# EAGLE board CT_schematic (EAGLE 7.6.0)

Size 100 x 80 mm. Coordinates in mm from the lower left corner, seen from the top.
Outline: 0,0 100,0 100,80 0,80 0,0
Copper layers (1*16): Top 0.035mm / dielectric 1.5mm / Bottom 0.035mm
Design rules "default": minimum track width 10mil, minimum drill 24mil, track to track 8mil, track to pad 8mil, pad to pad 8mil, via to via 8mil, smd to smd 8mil, copper to edge 40mil, drill to drill 8mil, minimum pad ring 10mil, minimum via ring 8mil, stop-mask expansion 4mil, vias tented up to drill 0mil, thermal gap 10mil

## Footprints (pad centres in the part's own frame; a part is rotated, then mirrored left to right if it is on the bottom)
C0603 = smd 0.8 x 0.8: 1 -0.762,0; 2 0.762,0
C0402 = smd 0.5 x 0.5: 1 -0.508,0; 2 0.508,0
C1210 = smd 1.2 x 2.5: 1 -1.524,0; 2 1.524,0
R0603 = smd 0.8 x 0.8: 1 -0.762,0; 2 0.762,0
EXV-9H = smd 3.505 x 1.676: 1 -2.857,0; 2 2.857,0
L0603 = smd 0.8 x 0.8: 1 -0.762,0; 2 0.762,0
IND25X25CZ = smd 2.489 x 3.429: 1 -2.718,0; 2 2.718,0
PJ-037B_PACKAGE = drill 3.7 square: 1 12,0 | drill 3.2 square: 2 6,0
LQFP100 = smd 0.3 x 1.2: 1 -6,-7.75; 2 -5.5,-7.75; 3 -5,-7.75; 4 -4.5,-7.75; 5 -4,-7.75; 6 -3.5,-7.75; 7 -3,-7.75; 8 -2.5,-7.75; 9 -2,-7.75; 10 -1.5,-7.75; 11 -1,-7.75; 12 -0.5,-7.75; 13 0,-7.75; 14 0.5,-7.75; 15 1,-7.75; 16 1.5,-7.75; 17 2,-7.75; 18 2.5,-7.75; 19 3,-7.75; 20 3.5,-7.75; 21 4,-7.75; 22 4.5,-7.75; 23 5,-7.75; 24 5.5,-7.75; 25 6,-7.75; 51 6,7.75; 52 5.5,7.75; 53 5,7.75; 54 4.5,7.75; 55 4,7.75; 56 3.5,7.75; 57 3,7.75; 58 2.5,7.75; 59 2,7.75; 60 1.5,7.75; 61 1,7.75; 62 0.5,7.75; 63 0,7.75; 64 -0.5,7.75; 65 -1,7.75; 66 -1.5,7.75; 67 -2,7.75; 68 -2.5,7.75; 69 -3,7.75; 70 -3.5,7.75; 71 -4,7.75; 72 -4.5,7.75; 73 -5,7.75; 74 -5.5,7.75; 75 -6,7.75 | smd 1.2 x 0.3: 26 7.75,-6; 27 7.75,-5.5; 28 7.75,-5; 29 7.75,-4.5; 30 7.75,-4; 31 7.75,-3.5; 32 7.75,-3; 33 7.75,-2.5; 34 7.75,-2; 35 7.75,-1.5; 36 7.75,-1; 37 7.75,-0.5; 38 7.75,0; 39 7.75,0.5; 40 7.75,1; 41 7.75,1.5; 42 7.75,2; 43 7.75,2.5; 44 7.75,3; 45 7.75,3.5; 46 7.75,4; 47 7.75,4.5; 48 7.75,5; 49 7.75,5.5; 50 7.75,6; 76 -7.75,6; 77 -7.75,5.5; 78 -7.75,5; 79 -7.75,4.5; 80 -7.75,4; 81 -7.75,3.5; 82 -7.75,3; 83 -7.75,2.5; 84 -7.75,2; 85 -7.75,1.5; 86 -7.75,1; 87 -7.75,0.5; 88 -7.75,0; 89 -7.75,-0.5; 90 -7.75,-1; 91 -7.75,-1.5; 92 -7.75,-2; 93 -7.75,-2.5; 94 -7.75,-3; 95 -7.75,-3.5; 96 -7.75,-4; 97 -7.75,-4.5; 98 -7.75,-5; 99 -7.75,-5.5; 100 -7.75,-6
SAMTEC_FTSH-105-01-L-DV-K = smd 0.762 x 2.794: 1 -2.54,-2.032; 2 -2.54,2.032; 3 -1.27,-2.032; 4 -1.27,2.032; 5 0,-2.032; 6 0,2.032; 7 1.27,-2.032; 8 1.27,2.032; 9 2.54,-2.032; 10 2.54,2.032
TDFN-8/6MM = smd 0.3 x 0.75: 1 0,0; 2 0.5,0; 3 1,0; 4 1.5,0; 5 1.5,3; 6 1,3; 7 0.5,3; 8 0,3
SOIC-8 = smd 1.6 x 0.6: 1 -2.7,1.905 | smd 1.55 x 0.6: 2 -2.7,0.635; 3 -2.7,-0.635; 4 -2.7,-1.905; 5 2.7,-1.905; 6 2.7,-0.635; 7 2.7,0.635; 8 2.7,1.905
182-009-MALE = drill 1.194 pad 1.524 octagon: 1 -5.537,10.923; 2 -2.769,10.923; 3 0,10.923; 4 2.769,10.923; 5 5.537,10.923; 6 -4.153,8.08; 7 -1.384,8.08; 8 1.384,8.08; 9 4.153,8.08 | hole 3.048: -12.446,9.501; 12.446,9.501
S25FL128SDSMFI000 = smd 0.5 x 1.6: 1 0,0; 2 1.27,0; 3 2.54,0; 4 3.81,0; 5 5.08,0; 6 6.35,0; 7 7.62,0; 8 8.89,0; 9 8.89,8.9; 10 7.62,8.9; 11 6.35,8.9; 12 5.08,8.9; 13 3.81,8.9; 14 2.54,8.9; 15 1.27,8.9; 16 0,8.9
SSOP-28 = smd 1.5 x 0.4: 1 -3.625,4.225; 2 -3.625,3.575; 3 -3.625,2.925; 4 -3.625,2.275; 5 -3.625,1.625; 6 -3.625,0.975; 7 -3.625,0.325; 8 -3.625,-0.325; 9 -3.625,-0.975; 10 -3.625,-1.625; 11 -3.625,-2.275; 12 -3.625,-2.925; 13 -3.625,-3.575; 14 -3.625,-4.225; 15 3.625,-4.225; 16 3.625,-3.575; 17 3.625,-2.925; 18 3.625,-2.275; 19 3.625,-1.625; 20 3.625,-0.975; 21 3.625,-0.325; 22 3.625,0.325; 23 3.625,0.975; 24 3.625,1.625; 25 3.625,2.275; 26 3.625,2.925; 27 3.625,3.575; 28 3.625,4.225
HTSS-105-01-G-D = drill 1 pad 1.8 square: 1 0,0 | drill 1 pad 1.8: 2 0,2.54; 3 2.54,0; 4 2.54,2.54; 5 5.08,0; 6 5.08,2.54; 7 7.62,0; 8 7.62,2.54; 9 10.16,0; 10 10.16,2.54
ASEK = smd 1.4 x 1: 1 -1.1,-0.8; 2 1.1,-0.8; 3 1.1,0.8; 4 -1.1,0.8
ASFL1 = smd 1.7 x 1.5: 1 -1.27,-1.1; 2 1.27,-1.1; 3 1.27,1.1; 4 -1.27,1.1
IR3899MTR1PBF = smd 0.25 x 0.75: 1 0,0; 2 0.5,0; 3 1,0; 4 1.5,0; 5 2,0; 6 2.5,0; 7 3,0 | smd 0.75 x 0.25: 8 3.425,0.78; 9 3.425,1.28; 10 3.425,1.78; 14 -0.425,1.78; 15 -0.425,1.28; 16 -0.425,0.78 | smd 0.3 x 1.95: 11 3.22,3.63 | smd 1.62 x 2.42: 12 1.786,3.8 | smd 1 x 1.95: 13 0.117,3.63 | smd 2.19 x 1.25: 17 1.51,1.26
WSON-8 = smd 0.3 x 0.6: 1 -0.75,0; 2 0.05,0; 3 0.85,0; 4 1.65,0; 5 1.65,3.8; 6 0.85,3.8; 7 0.05,3.8; 8 -0.75,3.8 | smd 3 x 2.6: PAD 0.45,1.9
SON-6 = smd 0.55 x 0.3: 1 -0.355,0.5 | smd 0.52 x 0.3: 2 -0.37,0; 3 -0.37,-0.5; 4 0.37,-0.5; 5 0.37,0; 6 0.37,0.5
SW_4-1437565-2 = smd 1.4 x 2.1: 1 -2.23,4.55; 2 -2.23,-4.55; 3 2.23,4.55; 4 2.23,-4.55
LGM67K-G1J2-24-Z = smd 0.8 x 1.4: A -2,0; C 0,0
NC7SZ125M5X = smd 1.3 x 0.7: 1 -1.3,0.95; 2 -1.3,0; 3 -1.3,-0.95; 4 1.3,-0.95; 5 1.3,0.95

## Placement (x,y rotation side)
C1  1e-06  [C0603]  -59.69,86.36 0 top  (outside the outline)
C2  1e-07  [C0603]  -63.5,86.36 0 top  (outside the outline)
C3  1e-07  [C0603]  -67.31,86.36 0 top  (outside the outline)
C4  1e-07  [C0603]  -71.12,86.36 0 top  (outside the outline)
C5  1e-07  [C0603]  -74.93,86.36 0 top  (outside the outline)
C6  1e-07  [C0603]  -78.74,86.36 0 top  (outside the outline)
C7  1e-07  [C0603]  -82.55,86.36 0 top  (outside the outline)
C8  4.7e-06  [C0603]  -44.45,86.36 0 top  (outside the outline)
C9  2.2e-06  [C0603]  -48.26,86.36 0 top  (outside the outline)
C10  2.2e-06  [C0603]  -52.07,86.36 0 top  (outside the outline)
C11  1e-08  [C0603]  -86.36,86.36 0 top  (outside the outline)
C12  1e-06  [C0603]  -15.24,91.44 0 top  (outside the outline)
C13  1e-07  [C0603]  -19.05,91.44 0 top  (outside the outline)
C14  1e-07  [C0402]  -83.82,91.44 0 top  (outside the outline)
C15  1e-08  [C0402]  -87.63,91.44 0 top  (outside the outline)
C16  1e-06  [C0603]  -22.86,91.44 0 top  (outside the outline)
C17  1e-06  [C0603]  -26.67,91.44 0 top  (outside the outline)
C18  1e-06  [C0603]  -30.48,91.44 0 top  (outside the outline)
C19  1e-06  [C0603]  -34.29,91.44 0 top  (outside the outline)
C20  1e-07  [C0402]  -15.24,96.52 0 top  (outside the outline)
C21  1e-07  [C0402]  -19.05,96.52 0 top  (outside the outline)
C22  1e-07  [C0402]  -22.86,96.52 0 top  (outside the outline)
C23  1e-07  [C0402]  -26.67,96.52 0 top  (outside the outline)
C24  1e-07  [C0402]  -30.48,96.52 0 top  (outside the outline)
C25  1e-08  [C0402]  -34.29,96.52 0 top  (outside the outline)
C26  1e-08  [C0402]  -38.1,96.52 0 top  (outside the outline)
C27  0.0001  [C1210]  -80.01,67.31 0 top  (outside the outline)
C28  2.2e-06  [C0603]  -55.88,86.36 0 top  (outside the outline)
C29  1e-07  [C0402]  -41.91,96.52 0 top  (outside the outline)
C30  1e-07  [C0402]  -45.72,96.52 0 top  (outside the outline)
C31  8.7488758840791e-09  [R0603]  -39.37,74.93 0 top  (outside the outline)
C32  2.9825713241179e-07  [R0603]  -49.53,74.93 0 top  (outside the outline)
C35  8e-07  [R0603]  -38.1,91.44 0 top  (outside the outline)
C36  1e-05  [C1210]  -86.36,67.31 0 top  (outside the outline)
C37  1e-07  [C0402]  -49.53,96.52 0 top  (outside the outline)
C38  0.0001  [EXV-9H]  -38.1,68.58 0 top  (outside the outline)
C39  0.0001  [EXV-9H]  -49.53,68.58 0 top  (outside the outline)
C40  1e-08  [C0402]  -53.34,96.52 0 top  (outside the outline)
C41  1e-08  [C0402]  -57.15,96.52 0 top  (outside the outline)
C42  1e-08  [C0402]  -60.96,96.52 0 top  (outside the outline)
F1  240.0  [L0603]  -41.91,91.44 0 top  (outside the outline)
I1  6.8e-07  [IND25X25CZ]  -59.69,68.58 0 top  (outside the outline)
J1  PJ-037B  [PJ-037B_PACKAGE]  -27.94,46.99 0 top  (outside the outline)
R2  1000.0  [R0603]  -45.72,91.44 0 top  (outside the outline)
R4  4700.0  [R0603]  -49.53,91.44 0 top  (outside the outline)
R5  4700.0  [R0603]  -53.34,91.44 0 top  (outside the outline)
R6  2200.0  [R0603]  -57.15,91.44 0 top  (outside the outline)
R7  2200.0  [R0603]  -60.96,91.44 0 top  (outside the outline)
R8  10000.0  [R0603]  -40.64,81.28 0 top  (outside the outline)
R9  10000.0  [R0603]  -45.72,81.28 0 top  (outside the outline)
R10  10000.0  [R0603]  -50.8,81.28 0 top  (outside the outline)
R11  10000.0  [R0603]  -55.88,81.28 0 top  (outside the outline)
R12  10000.0  [R0603]  -60.96,81.28 0 top  (outside the outline)
R13  10000.0  [R0603]  -66.04,81.28 0 top  (outside the outline)
R14  5.0  [R0603]  -64.77,91.44 0 top  (outside the outline)
R15  10000.0  [R0603]  -71.12,81.28 0 top  (outside the outline)
R16  10000.0  [R0603]  -76.2,81.28 0 top  (outside the outline)
R17  10000.0  [R0603]  -81.28,81.28 0 top  (outside the outline)
R18  120.0  [R0603]  -68.58,91.44 0 top  (outside the outline)
R19  10000.0  [R0603]  -86.36,81.28 0 top  (outside the outline)
R20  10000.0  [R0603]  -15.24,86.36 0 top  (outside the outline)
R21  10000.0  [R0603]  -20.32,86.36 0 top  (outside the outline)
R22  100000.0  [R0603]  -85.09,74.93 0 top  (outside the outline)
R23  0.1  [R0603]  -72.39,91.44 0 top  (outside the outline)
R24  4030.2416170974  [R0603]  -57.15,74.93 0 top  (outside the outline)
R25  719.68600305311  [R0603]  -64.77,74.93 0 top  (outside the outline)
R26  58.26650887574  [R0603]  -80.01,74.93 0 top  (outside the outline)
R27  130.0  [R0603]  -76.2,91.44 0 top  (outside the outline)
R28  39000.0  [R0603]  -25.4,86.36 0 top  (outside the outline)
R29  49900.0  [R0603]  -30.48,86.36 0 top  (outside the outline)
R30  5113.9346405229  [R0603]  -72.39,74.93 0 top  (outside the outline)
R31  100000.0  [R0603]  -15.24,81.28 0 top  (outside the outline)
R32  300000.0  [R0603]  -20.32,81.28 0 top  (outside the outline)
R33  100000.0  [R0603]  -25.4,81.28 0 top  (outside the outline)
R34  10000.0  [R0603]  -35.56,86.36 0 top  (outside the outline)
R35  10000.0  [R0603]  -40.64,86.36 0 top  (outside the outline)
R36  9100.0  [R0603]  -80.01,91.44 0 top  (outside the outline)
R37  680000.0  [R0603]  -30.48,81.28 0 top  (outside the outline)
R38  120000.0  [R0603]  -35.56,81.28 0 top  (outside the outline)
U1  STM32F469VGT6  [LQFP100]  -63.5,8.89 0 top  (outside the outline)
U2  FTSH-105-01-L-DV-K  [SAMTEC_FTSH-105-01-L-DV-K]  -68.58,30.48 0 top  (outside the outline)
U3  24AA128T-I/MNY  [TDFN-8/6MM]  -25.4,58.42 0 top  (outside the outline)
U4  MCP2562-E/SN  [SOIC-8]  -38.1,58.42 0 top  (outside the outline)
U5  182-009-113R531  [182-009-MALE]  -36.83,6.35 0 top  (outside the outline)
U6  S25FL128SDSMFI000  [S25FL128SDSMFI000]  -31.75,26.67 0 top  (outside the outline)
U7  ST3241EBPR  [SSOP-28]  -39.37,30.48 0 top  (outside the outline)
U8  HTSS-105-01-G-D  [HTSS-105-01-G-D]  -78.74,43.18 0 top  (outside the outline)
U9  ASEK-32.768KHz-ECST  [ASEK]  -29.21,68.58 0 top  (outside the outline)
U10  ASFL1-25MHZ-NCS  [ASFL1]  -74.93,58.42 0 top  (outside the outline)
U11  IR3899MTR1PBF  [IR3899MTR1PBF]  -60.96,41.91 0 top  (outside the outline)
U12  LP2951ACSDX/NOPB  [WSON-8]  -58.42,57.15 0 top  (outside the outline)
U13  TPS3895ADRYR  [SON-6]  -63.5,95.25 0 top  (outside the outline)
U14  4-1437565-2  [SW_4-1437565-2]  -44.45,45.72 0 top  (outside the outline)
U15  Q65110A2395  [LGM67K-G1J2-24-Z]  -68.58,67.31 0 top  (outside the outline)
U16  nc7sz125m5x  [NC7SZ125M5X]  -15.24,74.93 0 top  (outside the outline)
U17  nc7sz125m5x  [NC7SZ125M5X]  -21.59,74.93 0 top  (outside the outline)
U18  nc7sz125m5x  [NC7SZ125M5X]  -27.94,74.93 0 top  (outside the outline)

## Library data of the parts
C1-C32 C35-C42 F1 I1 J1 R2 R4-R38 U1-U18 = circuit_tree

## Nets
CLK_U1_5: U1.5 U9.3
CLK_U1_9: U1.9 U10.3
GND: C1.2 C2.2 C3.2 C4.2 C5.2 C6.2 C7.2 C8.2 C9.2 C10.2 C11.2 C12.2 C13.2 C14.2 C15.2 C16.2 C17.2 C18.2 C19.2 C20.2 C23.2 C24.2 C25.2 C26.2 C28.2 C29.2 C30.2 C35.2 C36.2 C37.2 C38.2 C39.2 C40.2 C41.2 C42.2 J1.2 R2.2 R13.2 R14.2 R17.2 R23.1 R23.2 R25.2 R28.2 R30.2 R33.2 R36.2 R38.2 U1.2 U1.7 U1.16 U1.23 U1.44 U1.59 U1.78 U2.3 U2.5 U3.4 U4.2 U4.8 U5.5 U6.10 U7.23 U7.25 U8.9 U9.2 U10.2 U11.4 U11.11 U11.17 U12.3 U12.4 U12.PAD U13.2 U15.C U16.2 U16.3 U17.1 U17.3 U18.1 U18.3
NET_U1_11: R5.1 U1.11 U18.4
NET_U1_18: C11.1 C12.1 F1.1 U1.17 U1.18
NET_U1_31: R9.1 U1.31
NET_U1_43: C9.1 U1.43
NET_U1_56: U1.56
NET_U1_62: U1.62
NET_U1_76: C10.1 U1.76
NET_U1_95: R6.1 U1.95 U3.6
NET_U1_96: R7.1 U1.96 U3.5
NET_U1_97: R8.1 U1.97
NET_U1_98: U15.A
NET_U1_99: U14.3 U14.4
NET_U2_9: R14.1 U2.9
NET_U3_1: R15.1 U3.1
NET_U3_2: R16.1 U3.2
NET_U3_3: R17.1 U3.3
NET_U4_6: R18.2 U4.6
NET_U5_2: R18.2 U4.6 U5.2
NET_U5_3: R18.1 U4.7 U5.3
NET_U6_3: R4.1 U6.3 U17.4
NET_U7_1: C22.1 U7.1
NET_U7_2: C22.2 U7.2
NET_U7_3: C24.1 U7.3
NET_U7_22: R22.1 U7.22
NET_U7_24: C21.2 U7.24
NET_U7_27: C23.1 U7.27
NET_U7_28: C21.1 U7.28
NET_U8_3: U7.4 U8.3
NET_U8_4: U7.5 U8.4
NET_U8_5: U7.9 U8.5
NET_U8_6: U7.10 U8.6
NET_U11_1: C31.1 R24.1 R25.1 R26.1 R27.1 U11.1 U11.8
NET_U11_2: C30.1 U11.2
NET_U11_3: C31.2 C32.1 C32.2 U11.3
NET_U11_5: R28.1 U11.5
NET_U11_10: C28.1 U11.10
NET_U11_12: C27.1 I1.1 U11.12
NET_U11_13: U11.13
NET_U11_14: C27.2 U11.14
NET_U11_15: R29.1 R30.1 U11.15
NET_U11_ATNET_3: I1.2 R24.2
NET_U11_ATNET_4: C32.2 R26.2
NET_U11_ATNET_5: R27.2
NET_U12_5: R31.1 U12.5
NET_U12_7: R32.2 R33.1 U12.7
NET_U13_1: R35.1 R36.1 U13.1
NET_U13_3: R37.2 R38.1 U13.3
NET_U13_4: R34.1 U13.4 U16.4 U17.2 U18.2
NET_U14_1: R2.1 U14.1 U14.2
PROC_CAN1_RX: U1.73 U4.4
PROC_CAN1_TX: U1.74 U4.1
PROC_QUADSPI_BK1_IO0: U1.69 U6.15
PROC_QUADSPI_BK1_IO1: U1.81 U6.8
PROC_QUADSPI_BK1_IO2: R20.1 U1.1 U6.9
PROC_QUADSPI_BK1_IO3: R21.1 U1.20 U6.1
PROC_QUADSPI_BK1_NCS: R19.1 U1.41 U6.7
PROC_QUADSPI_CLK: U1.28 U6.16
PROC_SYS_JTCK_SWCLK: R13.1 U1.79 U2.4
PROC_SYS_JTDI: R11.1 U1.80 U2.8
PROC_SYS_JTDO_SWO: U1.92 U2.6
PROC_SYS_JTMS_SWDIO: R12.1 U1.75 U2.2
PROC_UART4_RX: U1.82 U7.19
PROC_UART4_TX: U1.19 U7.14
RST_OUT_U2_JTAG_RST_B: R10.1 U2.10 U16.1
VCC_S1_16V9: C29.1 C35.1 C38.1 C39.1 J1.1 R29.2 U11.9 U12.8
VCC_TIER1_3V3: C1.1 C2.1 C3.1 C4.1 C5.1 C6.1 C7.1 C8.1 C13.1 C14.1 C15.1 C17.1 C18.1 C19.1 C20.1 C25.1 C26.1 C37.1 C40.1 C41.1 C42.1 F1.2 I1.2 R4.2 R5.2 R6.2 R7.2 R8.2 R9.2 R10.2 R11.2 R12.2 R15.2 R16.2 R19.2 R20.2 R21.2 R22.2 R24.2 R34.2 R35.2 R37.1 U1.3 U1.8 U1.24 U1.45 U1.55 U1.65 U1.77 U1.100 U2.1 U3.7 U3.8 U4.5 U6.2 U6.14 U7.26 U9.4 U10.4 U13.6 U16.5 U17.5 U18.5
VCC_TIER1_5V0: C16.1 C36.1 R31.2 R32.1 U4.3 U12.1

## Tracks (layer width: path | path; a pad name or v marks a point on that pad's centre or on a via)
CLK_U1_5  (1 unrouted)
CLK_U1_9  (1 unrouted)
GND  (80 unrouted)
NET_U1_11  (2 unrouted)
NET_U1_18  (4 unrouted)
NET_U1_31  (1 unrouted)
NET_U1_43  (1 unrouted)
NET_U1_76  (1 unrouted)
NET_U1_95  (2 unrouted)
NET_U1_96  (2 unrouted)
NET_U1_97  (1 unrouted)
NET_U1_99  (1 unrouted)
NET_U2_9  (1 unrouted)
NET_U3_1  (1 unrouted)
NET_U3_2  (1 unrouted)
NET_U3_3  (1 unrouted)
NET_U4_6  (1 unrouted)
NET_U5_2  (2 unrouted)
NET_U5_3  (2 unrouted)
NET_U6_3  (2 unrouted)
NET_U7_1  (1 unrouted)
NET_U7_2  (1 unrouted)
NET_U7_3  (1 unrouted)
NET_U7_22  (1 unrouted)
NET_U7_24  (1 unrouted)
NET_U7_27  (1 unrouted)
NET_U7_28  (1 unrouted)
NET_U8_3  (1 unrouted)
NET_U8_4  (1 unrouted)
NET_U8_5  (1 unrouted)
NET_U8_6  (1 unrouted)
NET_U11_1  (6 unrouted)
NET_U11_2  (1 unrouted)
NET_U11_3  (3 unrouted)
NET_U11_5  (1 unrouted)
NET_U11_10  (1 unrouted)
NET_U11_12  (2 unrouted)
NET_U11_14  (1 unrouted)
NET_U11_15  (2 unrouted)
NET_U11_ATNET_3  (1 unrouted)
NET_U11_ATNET_4  (1 unrouted)
NET_U12_5  (1 unrouted)
NET_U12_7  (2 unrouted)
NET_U13_1  (2 unrouted)
NET_U13_3  (2 unrouted)
NET_U13_4  (4 unrouted)
NET_U14_1  (2 unrouted)
PROC_CAN1_RX  (1 unrouted)
PROC_CAN1_TX  (1 unrouted)
PROC_QUADSPI_BK1_IO0  (1 unrouted)
PROC_QUADSPI_BK1_IO1  (1 unrouted)
PROC_QUADSPI_BK1_IO2  (2 unrouted)
PROC_QUADSPI_BK1_IO3  (2 unrouted)
PROC_QUADSPI_BK1_NCS  (2 unrouted)
PROC_QUADSPI_CLK  (1 unrouted)
PROC_SYS_JTCK_SWCLK  (2 unrouted)
PROC_SYS_JTDI  (2 unrouted)
PROC_SYS_JTDO_SWO  (1 unrouted)
PROC_SYS_JTMS_SWDIO  (2 unrouted)
PROC_UART4_RX  (1 unrouted)
PROC_UART4_TX  (1 unrouted)
RST_OUT_U2_JTAG_RST_B  (2 unrouted)
VCC_S1_16V9  (7 unrouted)
VCC_TIER1_3V3  (62 unrouted)
VCC_TIER1_5V0  (5 unrouted)